# Altium PCB SparkControl_V0.1.PcbDoc (part 1 of 2)
Units mil, origin at the board's own origin, x right, y up, seen from the top; angles counter-clockwise.
Board outline 3543.31 x 2051.35 mil, 2 copper layers (Top Layer, Bottom Layer), stack 61.811 mil thick; 57 components, 42 nets, 228 pads, 73 vias.
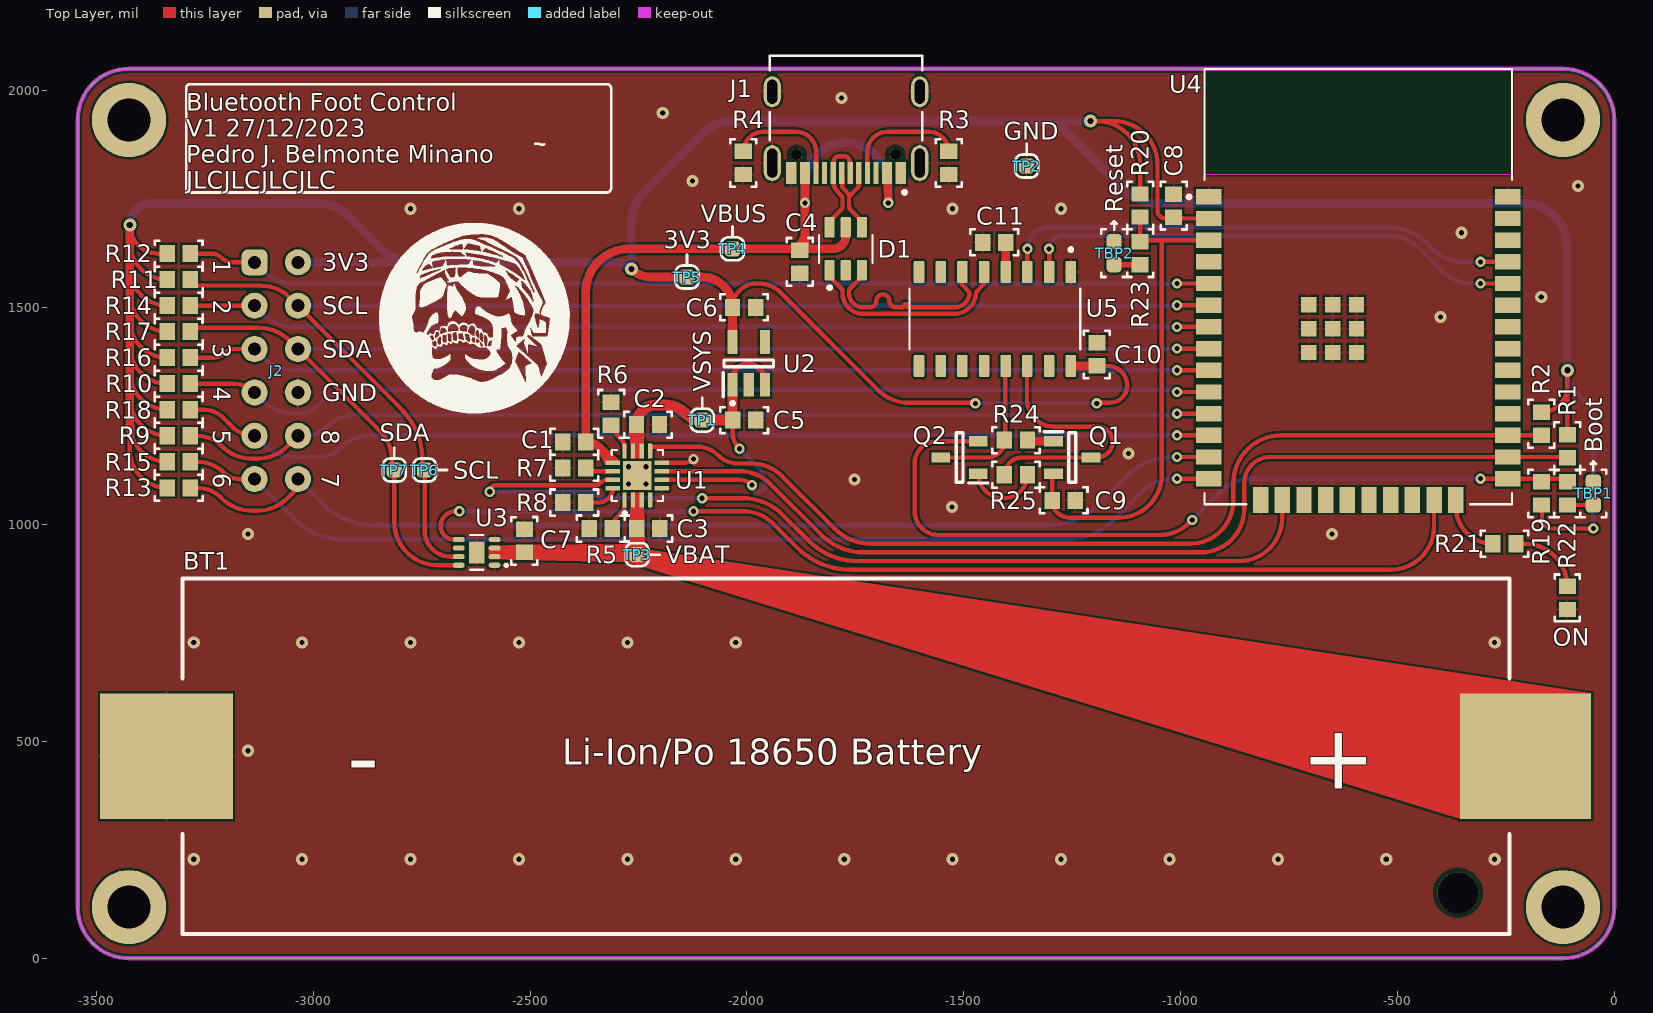
[diagram p0: Top Layer view]
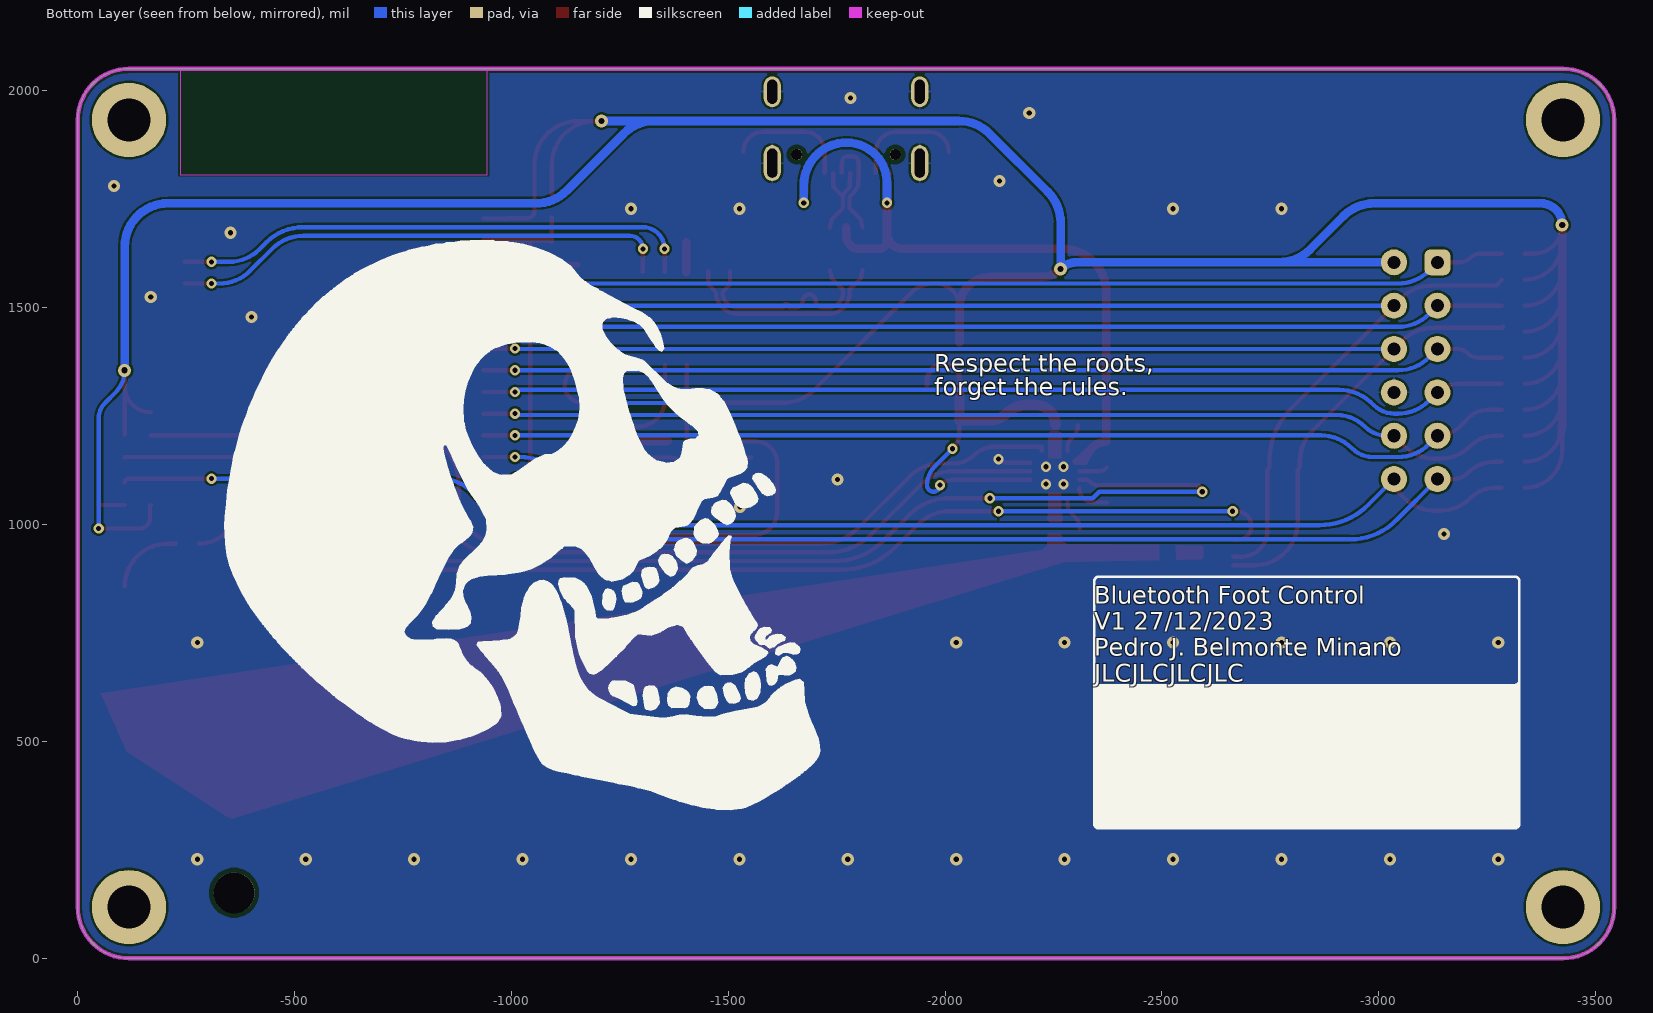
[diagram p1: Bottom Layer view, seen from below]
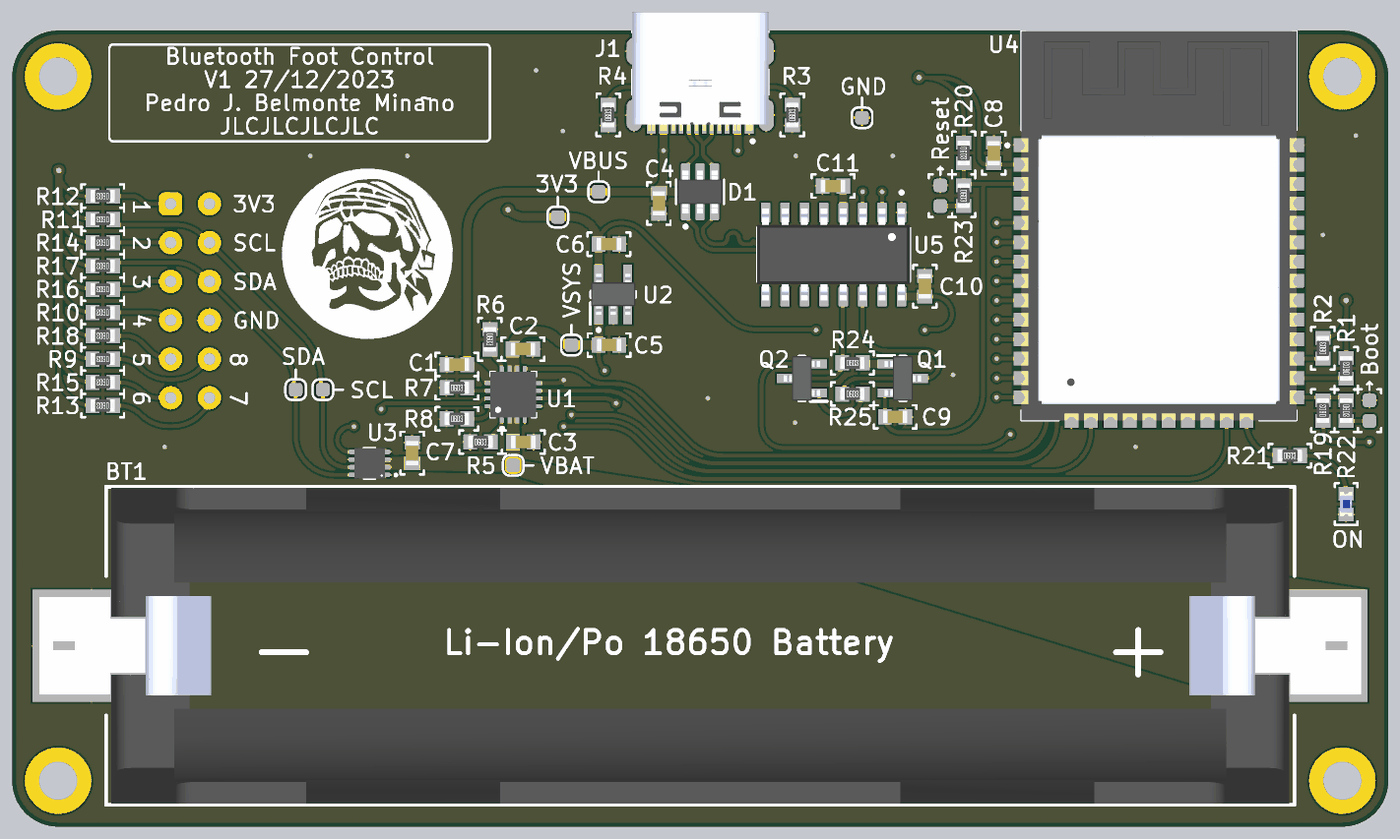
[diagram p2: 3D render of the assembled board from above, using the file's embedded part models]

## Layer stack, top to bottom
Top Solder: solder mask 0.5, Solder Resist, Dk 3.8
Top Layer: signal copper 1.378
Dielectric 1: dielectric 59.055, FR-4, Dk 4.5
Bottom Layer: signal copper 1.378
Bottom Solder: solder mask 0.5, Solder Resist, Dk 3.8

## Board outline
-3543.31,118.11 -3543.31,1933.24 cw(c-3425.2,1933.24) -3425.2,2051.35 -118.11,2051.35 cw(c-118.11,1933.24) 0,1933.24 0,118.11 cw(c-118.11,118.11) -118.11,0 -3425.2,0 cw(c-3425.2,118.11)

## Design rules (kind name [scope] priority, off if disabled: settings)
BoardOutlineClearance [All] p1: gap=7.87 ignorepadtopadclearanceinfootprint=FALSE
Clearance [All] p1: gap=5 ignorepadtopadclearanceinfootprint=FALSE except(7.87: Arc-SMDPad Track-SMDPad; 10: Arc-Via Arc-Hole Track-Via Track-Hole SMDPad-THPad SMDPad-Hole THPad-Hole Via-Hole Fill-Hole Poly-Hole Region-Hole Text-Hole)
ComponentClearance [All] p1: gap=5 collisioncheckmode=3 verticalgap=5 showdistances=TRUE
DiffPairsRouting DiffPair_diff90DiffPairsRouting [InDifferentialPairClass('diff90')] p1: maxlimit=61 minlimit=5 mostfreqgap=5 toplayer_minwidth=10 toplayer_maxwidth=10.01 toplayer_prefwidth=10 bottomlayer_minwidth=10 bottomlayer_maxwidth=10.01 bottomlayer_prefwidth=10 impedanceprofiledriven=TRUE impedanceprofileid={D8C5F25A-CF25-4C84-996E-1A9095AA118A} impedanceprofilevalue=90.000000 maxuncoupledlength=10
DiffPairsRouting [All] p2: maxlimit=10 minlimit=5 mostfreqgap=5 toplayer_minwidth=5 toplayer_maxwidth=1000 toplayer_prefwidth=5 bottomlayer_minwidth=5 bottomlayer_maxwidth=1000 bottomlayer_prefwidth=5 maxuncoupledlength=500
Height [All] p1: minheight=0 maxheight=71497.94 prefheight=500
HoleSize [All] p1: absolutevalues=TRUE maxlimit=248.03 minlimit=11.81 maxpercent=80.000 minpercent=20.000
HoleToHoleClearance [All] p1: gap=19.68 allowstackedmicrovias=FALSE
MatchedLengths DiffPair_diff90MatchedLengths [InDifferentialPairClass('diff90')] p1: tolerance=10 checknetsindiffpair=TRUE checkdiffpairvsdiffpair=FALSE checkxsignals=FALSE checkothers=FALSE
MinimumAnnularRing [All] p1: minimumring=5.12
MinimumSolderMaskSliver [All] p1: minsoldermaskwidth=0
PlaneClearance [InNet('GND')] p1: clearance=5
PlaneConnect PlaneConnectPowerPads [InPadClass('PowerPads')] p1: planeconnectstyle=Direct reliefexpansion=20 reliefentries=4 reliefconductorwidth=10 reliefairgap=10
PlaneConnect [InNet('GND')] p2: pad.planeconnectstyle=Relief pad.reliefexpansion=11.81 pad.reliefentries=4 pad.reliefconductorwidth=5 pad.reliefairgap=5 via.planeconnectstyle=Direct via.reliefexpansion=11.81 via.reliefentries=4 via.reliefconductorwidth=5 via.reliefairgap=5
PolygonConnect PolygonConnectPowerPads [InNet('GND') vs (InPadClass('PowerPads'))] p1: connectstyle=Direct reliefconductorwidth=10 reliefentries=4 polygonreliefangle="90 Angle" airgapwidth=10
PolygonConnect [InNet('GND')] p2: thpad.connectstyle=Relief thpad.reliefconductorwidth=5 thpad.reliefentries=4 thpad.polygonreliefangle="90 Angle" thpad.airgapwidth=5 smdpad.connectstyle=Relief smdpad.reliefconductorwidth=5 smdpad.reliefentries=4 smdpad.polygonreliefangle="90 Angle" smdpad.airgapwidth=5 via.connectstyle=Direct via.reliefconductorwidth=5 via.reliefentries=4 via.polygonreliefangle="90 Angle" via.airgapwidth=5
RoutingVias [All] p1: holewidth=11.81 width=23.62 viastyle="Through Hole" minholewidth=11.81 minwidth=19.68 maxholewidth=248.03 maxwidth=259.84
SilkToSilkClearance [All] p1: silktosilkclearance=0
SilkToSolderMaskClearance [IsPad] p1: minsilkscreentomaskgap=5.91 clearancetoexposedcopper=TRUE
SolderMaskExpansion [All] p1: expansion=1.5 istentingtop=FALSE
Width [All] p1: maxlimit=1000 minlimit=5 preferedwidth=5 minimp=50.000000 maximp=50.000000 favimp=50.000000
20 further rules are at their usual default settings.

## Classes and differential pairs
component class ESP32: C8 C9 C10 C11 J2 ON Q1 Q2 R9 R10 R11 R12 R13 R14 R15 R16 R17 R18 R19 R20 R21 R22 R23 R24 R25 TBP1 TBP2 TP6 TP7 U4 U5
component class U_USB_&_Power: BT1 C1 C2 C3 C4 C5 C6 C7 D1 J1 R1 R2 R3 R4 R5 R6 R7 R8 TP1 TP2 TP3 TP4 TP5 U1 U2 U3
differential pair class diff90: NRF USB USB_2
differential pair USB: +USB_P -USB_N
differential pair NRF: +NRF_P -NRF_N

## Components (designator, comment, footprint, x,y, rotation, side; value= is the part's Value field where it differs from the comment)
BT1 "BH-18650-B1BA002" BH-18650-B1BA002 -1771.65,466 r0 top locked
C1 "1 µF" "CAP 0603_1608" -2398.31,1191 r0 top
C2 "4.7 µF" "CAP 0603_1608" -2228.31,1230.5 r180 top
C3 "4.7 µF" "CAP 0603_1608" -2227.31,991 r180 top
C4 "0.1 µF" "CAP 0603_1608" -1878.31,1606 r90 top
C5 "1 µF" "CAP 0603_1608" -2006.43,1241 r180 top
C6 "1 µF" "CAP 0603_1608" -2006.73,1501 r180 top
C7 "0.1 µF" "CAP 0603_1608" -2513.31,962.57 r270 top
C8 "0.1 µF" "CAP 0603_1608" -1016,1735.57 r270 top
C9 "1 µF" "CAP 0603_1608" -1269.73,1056 r180 top
C10 "0.1 µF" "CAP 0603_1608" -1193.31,1392.57 r270 top
C11 "0.1 µF" "CAP 0603_1608" -1429.88,1651 r0 top
D1 "USBLC6-2SC6" SOT95P280X145-6N -1772.26,1636 r90 top locked
J1 "USB-TYPE-C-017" USB-TYPE-C-017 -1771.65,1811.27 r180 top locked
J2 "Button Pinout" PINOUT -3085.37,1355 r270 top locked
ON "Blue" "LED 0603_1608 BLUE" -108.31,831 r270 top (schematic designator D2)
Q1 "S8050" SOT95P240X115-3N -1249.81,1155 r0 top
Q2 "S8050" SOT95P240X115-3N -1509.81,1155 r180 top
R1 "4.7 kΩ" "RES 0603_1608" -108.31,1181 r90 top
R2 "4.7 kΩ" "RES 0603_1608" -168.31,1232.57 r90 top
R3 "5.1 kΩ" "RES 0603_1608" -1534.64,1834.15 r90 top
R4 "5.1 kΩ" "RES 0603_1608" -2008.66,1834.15 r90 top
R5 "10 kΩ" "RES 0603_1608" -2337.31,991 r0 top
R6 "4.7 kΩ" "RES 0603_1608" -2313.31,1255.57 r270 top
R7 "47 kΩ" "RES 0603_1608" -2398.31,1131 r0 top
R8 "1.78 kΩ" "RES 0603_1608" -2398.31,1051 r0 top
R9 "4.7 kΩ" "RES 0603_1608" -3310.37,1205 r180 top
R10 "4.7 kΩ" "RES 0603_1608" -3310.37,1325 r180 top
R11 "4.7 kΩ" "RES 0603_1608" -3310.37,1565 r180 top
R12 "4.7 kΩ" "RES 0603_1608" -3310.37,1625 r180 top
R13 "4.7 kΩ" "RES 0603_1608" -3310.37,1085 r180 top
R14 "4.7 kΩ" "RES 0603_1608" -3310.37,1505 r180 top
R15 "4.7 kΩ" "RES 0603_1608" -3310.37,1145 r180 top
R16 "4.7 kΩ" "RES 0603_1608" -3310.37,1385 r180 top
R17 "4.7 kΩ" "RES 0603_1608" -3310.37,1445 r180 top
R18 "4.7 kΩ" "RES 0603_1608" -3310.37,1265 r180 top
R19 "12k" "RES 0603_1608" -168.31,1072 r90 top value="12 kΩ"
R20 "12k" "RES 0603_1608" -1093.31,1736 r270 top value="12 kΩ"
R21 "470" "RES 0603_1608" -253.31,956 r0 top value="470 Ω"
R22 "470" "RES 0603_1608" -108.31,1072 r270 top value="470 Ω"
R23 "470" "RES 0603_1608" -1093.31,1626 r270 top value="470 Ω"
R24 "12k" "RES 0603_1608" -1379.81,1195 r0 top value="12 kΩ"
R25 "12k" "RES 0603_1608" -1379.81,1115 r0 top value="12 kΩ"
TBP1 "Boot" "Tweezer-bridgeable Pads" -48.31,1072 r90 top
TBP2 "Reset" "Tweezer-bridgeable Pads" -1153.31,1626 r90 top
TP1 "VSYS" TestPoint -2103.31,1241 r90 top
TP2 "GND" TestPoint -1355,1827 r90 top
TP3 "VBAT" TestPoint -2253.31,931 r0 top
TP4 "VBUS" TestPoint -2033.31,1636 r90 top
TP5 "3V3" TestPoint -2138.31,1571 r90 top
TP6 "SCL" TestPoint -2743.31,1126 r0 top
TP7 "SDA" TestPoint -2813.31,1126 r90 top
U1 "BQ24075RGTR" QFN50P300X300X100-17N -2252.95,1113.43 r90 top
U2 "ME6211C33M5G-N" SOT95P270X145-5N -1995.91,1371.79 r90 top
U3 "MAX17048G+" SON50P200X200X80-9N -2623.31,936 r180 top
U4 "ESP32-WROOM-32E_(16MB)" XCVR_ESP32-WROOM-32E_(16MB) -590.55,1548.91 r0 top locked
U5 "CH340C" SOIC127P600X180-16N -1428.31,1474.27 r270 top locked

## Footprints (in the part's own frame and the unit in brackets; to place one, negate y for a bottom-side part, rotate by r counter-clockwise, add the part's x,y. Pads: shape width x height; smd on the part's side, far side on the other; paste and mask are expansions set on the pad)
BH-18650-B1BA002 [mm]
  rect 7.77x7.35 smd: N(-39.8,0)
  rect 7.7x7.35 smd: P(39.8,0)
  round 2.39 hole 2.4 unplated: ""(35.84,-8)
  silkscreen extent -38.86,-10.41 38.86,10.41, body extent -43.23,-10.33 43.23,10.33, height 14.86
"CAP 0603_1608" [mm] "Chip Capacitor, 2-Leads, Body 1.60x0.80mm, IPC Medium Density"
  rect 0.9x1 smd: 1(-0.675,0) 2(0.675,0)
  silkscreen extent -1.4,-0.76 1.4,0.76, body extent -0.8,-0.41 0.8,0.41, height 0.82
"LED 0603_1608 BLUE" [mm] "Chip Diode, 2-Leads, Body 1.60x0.80mm, IPC Medium Density"
  rect 0.9x1 smd: 1(-0.675,0) 2(0.675,0)
  silkscreen extent -1.37,-0.74 1.37,0.74, body extent -0.8,-0.4 0.8,0.4, height 0.53
PINOUT [mil]
  rrect50% 60x60 hole 30: 1(-250,-50)
  round 60 hole 30: 2(-150,-50) 3(-50,-50) 4(50,-50) 5(150,-50) 6(250,-50) 7(250,50) 8(150,50) 9(50,50) 10(-50,50) 11(-150,50) 12(-250,50)
QFN50P300X300X100-17N [mm]
  rrect25% 0.86x0.26 smd: 1(-1.435,0.75) 2(-1.435,0.25) 3(-1.435,-0.25) 4(-1.435,-0.75) 9(1.435,-0.75) 10(1.435,-0.25) 11(1.435,0.25) 12(1.435,0.75)
  rrect25% 0.26x0.86 smd: 5(-0.75,-1.435) 6(-0.25,-1.435) 7(0.25,-1.435) 8(0.75,-1.435) 13(0.75,1.435) 14(0.25,1.435) 15(-0.25,1.435) 16(-0.75,1.435)
  rect 1.68x1.68 smd paste-2: 17(0,0)
  silkscreen extent -2.34,-1.5 1.5,1.5, body extent -1.5,-1.5 1.5,1.5, height 1
"RES 0603_1608" [mm] "Chip Resistor, 2-Leads, Body 1.60x0.80mm, IPC Medium Density"
  rect 0.9x1 smd: 1(-0.675,0) 2(0.675,0)
  silkscreen extent -1.4,-0.76 1.4,0.76, body extent -0.8,-0.4 0.8,0.4, height 0.45
SOIC127P600X180-16N [mm]
  rrect25% 1.31x0.62 smd: 1(-2.75,4.445) 2(-2.75,3.175) 3(-2.75,1.905) 4(-2.75,0.635) 5(-2.75,-0.635) 6(-2.75,-1.905) 7(-2.75,-3.175) 8(-2.75,-4.445) 9(2.75,-4.445) 10(2.75,-3.175) 11(2.75,-1.905) 12(2.75,-0.635) 13(2.75,0.635) 14(2.75,1.905) 15(2.75,3.175) 16(2.75,4.445)
  silkscreen extent -4.16,-5 1.78,5, body extent -3,-5 3,5, height 1.8
SON50P200X200X80-9N [mm]
  oval 0.7x0.3 smd: 1(-1.05,0.75) 2(-1.05,0.25) 3(-1.05,-0.25) 4(-1.05,-0.75) 5(1.05,-0.75) 6(1.05,-0.25) 7(1.05,0.25) 8(1.05,0.75)
  rect 0.9x1.3 smd paste-2: 9(0,0)
  silkscreen extent -1.78,-1.02 0.38,1.02, body extent -1,-1 1,1, height 0.8
SOT95P240X115-3N [mm]
  rect 1.1x0.6 smd: 1(-1.1,0.95) 2(-1.1,-0.95) 3(1.1,0)
  silkscreen extent -1.65,-1.45 0.2,1.5, body extent -1.2,-1.45 1.2,1.45, height 1.15
SOT95P270X145-5N [mm]
  rect 1.4x0.6 smd: 1(-1.25,0.95) 2(-1.25,0) 3(-1.25,-0.95) 4(1.25,-0.95) 5(1.25,0.95)
  silkscreen extent -2.44,-1.45 0.2,1.5, body extent -1.35,-1.45 1.35,1.45, height 1.45
SOT95P280X145-6N [mm]
  rrect25% 1.21x0.59 smd: 1(-1.255,0.95) 2(-1.255,0) 3(-1.255,-0.95) 4(1.255,-0.95) 5(1.255,0) 6(1.255,0.95)
  silkscreen extent -2.38,-1.57 0.81,1.57, body extent -1.4,-1.46 1.4,1.46, height 1.44
TestPoint [mil]
  rrect50% 35x35 smd mask+4: 1(0,0)
  silkscreen extent -26,-26 52,26
"Tweezer-bridgeable Pads" [mil]
  rrect50% 35x35 smd: 1(-26.57,0) 2(26.57,0)
  silkscreen extent -55,-30 74,30
USB-TYPE-C-017 [mm]
  rect 0.6x1.3 smd paste-100 mask+0.05: A1B12(-3.2,0.007) A4B9(-2.4,0.007) B1A12(3.2,0.007) B4A9(2.4,0.007)
  rect 0.3x1.3 smd paste-100 mask+0.05: A5(-1.25,0.007) A6(-0.25,0.007) A7(0.25,0.007) A8(1.25,0.007) B5(1.75,0.007) B6(0.75,0.007) B7(-0.75,0.007) B8(-1.75,0.007)
  oval 1x2.1 hole 0.6 slot 1.7 at 90 deg paste+0 mask+0.05: S1(-4.32,-0.571) S2(4.32,-0.571)
  oval 1x1.8 hole 0.6 slot 1.4 at 90 deg paste+0 mask+0.05: S3(-4.32,-4.751) S4(4.32,-4.751)
  round 0.65 hole 0.65 unplated paste+0: ""(-2.89,-1.07) ""(2.89,-1.071)
  silkscreen extent -4.47,-6.86 4.47,1.24, body extent -4.47,-7.3 4.47,0.45, height 3.26
XCVR_ESP32-WROOM-32E_(16MB) [mm]
  rect 1.5x0.9 smd: 1(-8.75,5.26) 2(-8.75,3.99) 3(-8.75,2.72) 4(-8.75,1.45) 5(-8.75,0.18) 6(-8.75,-1.09) 7(-8.75,-2.36) 8(-8.75,-3.63) 9(-8.75,-4.9) 10(-8.75,-6.17) 11(-8.75,-7.44) 12(-8.75,-8.71) 13(-8.75,-9.98) 14(-8.75,-11.25) 25(8.75,-11.25) 26(8.75,-9.98) 27(8.75,-8.71) 28(8.75,-7.44) 29(8.75,-6.17) 30(8.75,-4.9) 31(8.75,-3.63) 32(8.75,-2.36) 33(8.75,-1.09) 34(8.75,0.18) 35(8.75,1.45) 36(8.75,2.72) 37(8.75,3.99) 38(8.75,5.26)
  rect 0.9x1.5 smd: 15(-5.715,-12.5) 16(-4.445,-12.5) 17(-3.175,-12.5) 18(-1.905,-12.5) 19(-0.635,-12.5) 20(0.635,-12.5) 21(1.905,-12.5) 22(3.175,-12.5) 23(4.445,-12.5) 24(5.715,-12.5)
  rect 0.9x0.9 smd: 39(-2.9,-3.86) 39(-2.9,-2.46) 39(-2.9,-1.06) 39(-1.5,-3.86) 39(-1.5,-2.46) 39(-1.5,-1.06) 39(-0.1,-3.86) 39(-0.1,-2.46) 39(-0.1,-1.06)
  Keep-Out Layer region: 9,6.56 -9,6.56 -9,12.75 9,12.75
  silkscreen extent -10.01,-12.75 9,12.75, body extent -9,-12.75 9,12.75, height 3.25

## Part data
BT1: Package="DFN-8 Memory Protection Devices", Availability=Unavailable, MF="MPD _Memory", MP=BH-18650-PC, Price=None, SnapEDA_Link=https://www.snapeda.com/parts/BH-18650-PC/MPD%20%28Memory%20Protection%20Devices%29/view-part/779074/?ref=snap
C1 C5 C6 C9: library part 0603B105K250CT, "CAP CER 1UF 25V X7R 0603", Device Package=0603, Manufacturer="Walsin Technology Corporation", Operating Temperature="-55°C ~ 125°C", Package / Case="0603 (1608 Metric)", Supplier Part Number 1=1292-0603B105K250CT-ND, Temperature Coefficient=X7R, Tolerance=±10%, Voltage - Rated=25V, Applications="General Purpose", Capacitance="1 µF", ComponentLink1Description=Datasheet, ComponentLink1URL=https://www.passivecomponent.com/wp-content/uploads/datasheet/WTC_MLCC_General_Purpose.pdf, ComponentLink2Description="DigiKey Link", ComponentLink2URL=https://www.digikey.com/en/products/detail/walsin-technology-corporation/0603B105K250CT/14836817, lastupdated="16/06/2023 19:14:03", Lifecycle Status=Active, Minimum Order=1, Mounting Type="Surface Mount, MLCC", packaging=TapeAndReel, Part Number=0603B105K250CT, Part Status=Active, PartId=41189, Price=0.03, series=-, Size / Dimension="0.063\" L x 0.031\" W (1.60mm x 0.80mm)", Supplier 1=DigiKey, Thickness (Max)="0.037\" (0.95mm)"
C2 C3: library part 0603YW475KAT2A, "CAP CER 4.7UF 16V X6S 0603", Device Package=0603, Manufacturer="KYOCERA AVX", Operating Temperature="-55°C ~ 105°C", Package / Case="0603 (1608 Metric)", Supplier Part Number 1=478-0603YW475KAT2ACT-ND, Temperature Coefficient=X6S, Tolerance=±10%, Voltage - Rated=16V, Applications="General Purpose", Capacitance="4.7 µF", ComponentLink1Description=Datasheet, ComponentLink1URL=https://catalogs.kyocera-avx.com/SurfaceMount.pdf, ComponentLink2Description="DigiKey Link", ComponentLink2URL=https://www.digikey.com/en/products/detail/kyocera-avx/0603YW475KAT2A/14112130, lastupdated="16/06/2023 19:14:19", Lifecycle Status=Active, Minimum Order=1, Mounting Type="Surface Mount, MLCC", packaging=TapeAndReel, Part Number=0603YW475KAT2A, Part Status=Active, PartId=35833, Price=0.07, series=-, Size / Dimension="0.063\" L x 0.031\" W (1.60mm x 0.80mm)", Supplier 1=DigiKey, Thickness (Max)="0.039\" (1.00mm)"
C4 C8 C10 C11: library part 100X14W104MV4T, "CAP CER 0.1UF 10V X7R 0603", Device Package=0603, Manufacturer="Johanson Dielectrics Inc.", Operating Temperature="-55°C ~ 125°C", Package / Case="0603 (1608 Metric)", Supplier Part Number 1=709-1101-1-ND, Temperature Coefficient=X7R, Tolerance=±20%, Voltage - Rated=10V, Applications="Bypass, Decoupling", Capacitance="0.1 µF", ComponentLink1Description=Datasheet, ComponentLink1URL=https://www.johansondielectrics.com/downloads/x2y-filter-and-decoupling-capacitors.pdf, ComponentLink2Description="DigiKey Link", ComponentLink2URL=https://www.digikey.com/en/products/detail/johanson-dielectrics-inc/100X14W104MV4T/1655914, Features="Low ESL (X2Y)", lastupdated="16/06/2023 19:15:23", Lifecycle Status=Active, Minimum Order=1, Mounting Type="Surface Mount, MLCC", packaging=TapeAndReel, Part Number=100X14W104MV4T, Part Status=Active, PartId=2680, Price=0.08, series=X2Y®, Size / Dimension="0.064\" L x 0.035\" W (1.63mm x 0.89mm)", Supplier 1=DigiKey, Thickness (Max)="0.026\" (0.66mm)"
C7: library part C0603C104K5RAC7411, "CAP CER 0.1UF 50V X7R 0603", Device Package="0603 (1608 Metric)", Manufacturer=KEMET, Operating Temperature="-55°C ~ 125°C", Supplier Part Number 1=399-C0603C104K5RAC7411CT-ND, Temperature Coefficient=X7R, Tolerance=±10%, Voltage - Rated=50V, Applications="Bypass, Decoupling", Capacitance="0.1 µF", ComponentLink1Description=Datasheet, ComponentLink1URL=https://api.kemet.com/component-edge/download/datasheet/C0603C104K5RAC7411.pdf, ComponentLink2Description="DigiKey Link", ComponentLink2URL=https://www.digikey.com/en/products/detail/kemet/C0603C104K5RAC7411/3317013, lastupdated="10/08/2023 19:08:04", Lifecycle Status=Active, Minimum Order=1, Mounting Type="Surface Mount, MLCC", Package / Case="0603 (1608 Metric)", packaging=TapeAndReel, Part Number=C0603C104K5RAC7411, Part Status=Active, PartId=2233, Price=0.01, series="SMD Comm X7R", Size / Dimension="0.063\" L x 0.031\" W (1.60mm x 0.80mm)", Supplier 1=DigiKey, Thickness (Max)="0.035\" (0.90mm)"
D1: "Very low capacitance ESD protection, 3.5 pF, -40 to 125 degC, 6-Pin SOT23, RoHS, Tape and Reel", Capacitance Value=3.5pF, Clamping Voltage=17V, Leakage Current=0.15uA, Manufacturer=STMicroelectronics, Operating Temp Range=-40Cto125C, Operating Temperature Classification=Automotive, Operating Temperature Max Deg. C=125C, Operating Temperature Min Deg. C=-40C, Package / Case=SOT-23, Package Description="6-Pin Small Outline Transistor, Body 2.925 x 1.625 mm, Pitch 0.95 mm", Package Reference=SOT23-6L, Peak Pulse Current=5A, Reverse Breakdown Voltage=6V, Reverse Stand-off Voltage=5V, Test Current (It)=1mA, Category=Diode, Clamping Voltage (Max)=17V, Configuration=Dual, Datasheet URL=http://www.st.com/st-web-ui/static/active/en/resource/technical/document/datasheet/CD00050750.pdf, Datasheet Version="Rev. 5, 10/2011", Direction Type=Uni-Directional, Leakage Current (Max)=0.15uA, Manufacturer Part Number=USBLC6-2SC6, Manufacturer URL=http://www.st.com/, Mounting=SurfaceMount, Mounting Style=SurfaceMount, Number of Elements=1, packaging=TapeandReel, Pin Count=6, Polarity=Uni-Directional, Product Depth (mm)=1.75mm, Product Height (mm)=1.3mm, Product Length (mm)=3.05mm, Rad Hardened=No, Suppressor Type=DiodeArrays, Working Voltage=5V, Working Voltage (Max)=5V
J1: "3A 1 Surface Mount 16P Female -25℃~+85℃ Type-C SMD USB Connectors ROHS", Package=None, Availability="In Stock", Check_prices=https://www.snapeda.com/parts/CSP-USC16-TR/Valcon/view-part/?ref=eda, MF=Valcon, MP=CSP-USC16-TR, Price=None, Purchase-URL=https://pricing.snapeda.com/search/part/CSP-USC16-TR/?ref=eda, SnapEDA_Link=https://www.snapeda.com/parts/CSP-USC16-TR/Valcon/view-part/?ref=snap
ON: library part LED, "LED BLUE 0603 SMD", Current - Test=20mA, Device Package="0603 (1608 Metric)", Lens Color=1.00mm, Manufacturer="Vishay Semiconductor Opto Division", Millicandela Rating=104mcd, Part Number=VLMB1300-GS08, Supplier Device Package=0603, Supplier Part Number 1=VLMB1300-GS08CT-ND, Voltage - Forward (Vf) (Typ)=3.3V, Category=LED, Color=Blue, ComponentLink1Description=Datasheet, ComponentLink1URL=http://www.vishay.com/docs/82437/vlmo1300.pdf, ComponentLink2Description="DigiKey Link", ComponentLink2URL=http://digikey.com/product-detail/en/vishay-semiconductor-opto-division/VLMB1300-GS08/VLMB1300-GS08CT-ND/3025485, Configuration=Standard, Height (Max)=1.00mm, lastupdated="09/02/2020 01:20:26", Lens Size="1.10mm x 0.80mm", Lens Style="Rectangle with Flat Top", Lifecycle Status=Active, Minimum Order=1, Mounting Type="Surface Mount", Package / Case="0603 (1608 Metric)", packaging=TapeAndReel, Part Status=Active, PartId=785, Price=0.08, series=CHIPLED, Size=0603, Size / Dimension="1.60mm L x 0.80mm W", Supplier 1=DigiKey, Viewing Angle=130°, Wavelength - Dominant=470nm, Wavelength - Peak=468nm
Q1 Q2: "Transistor", Manufacturer_Name="Yenji Elec", Category="BJT Transistor", Datasheet Link=https://datasheet.lcsc.com/szlcsc/Yenji-Elec-S8050_C139514.pdf, Height=1.15mm, Manufacturer_Part_Number=S8050
R1 R2 R9 R10 R11 R12 R13 R14 R15 R16 R17 R18: library part ERA-3AEB472V, "RES SMD 4.7K OHM 0.1% 1/10W 0603", Device Package=0603, Manufacturer="Panasonic Electronic Components", Operating Temperature="-55°C ~ 155°C", Package / Case="0603 (1608 Metric)", Power (Watts)="0.1W, 1/10W", Ratings=AEC-Q200, Resistance="4.7 kOhms", Supplier Part Number 1=P4.7KDBCT-ND, Temperature Coefficient=±25ppm/°C, Tolerance=±0.1%, ComponentLink1Description=Datasheet, ComponentLink1URL=https://industrial.panasonic.com/cdbs/www-data/pdf/RDM0000/AOA0000C307.pdf, ComponentLink2Description="DigiKey Link", ComponentLink2URL=https://www.digikey.com/en/products/detail/panasonic-electronic-components/ERA-3AEB472V/1465870, Composition="Thin Film", Features="Automotive AEC-Q200", Height - Seated (Max)="0.022\" (0.55mm)", lastupdated="02/08/2023 19:13:59", Lifecycle Status=Active, Minimum Order=1, Number of Terminations=2, packaging=TapeAndReel, Part Number=ERA-3AEB472V, Part Status=Active, PartId=5519, Price=0.03, series=ERA-3A, Size / Dimension="0.063\" L x 0.031\" W (1.60mm x 0.80mm)", Supplier 1=DigiKey, Supplier Device Package=0603
R3 R4: library part RMCF0603JG5K10, "RES 5.1K OHM 5% 1/10W 0603", Device Package=0603, Manufacturer="Stackpole Electronics Inc", Operating Temperature="-55°C ~ 155°C", Package / Case="0603 (1608 Metric)", Power (Watts)="0.1W, 1/10W", Ratings=AEC-Q200, Resistance="5.1 kOhms", Supplier Part Number 1=738-RMCF0603JG5K10CT-ND, Temperature Coefficient=±200ppm/°C, Tolerance=±5%, ComponentLink1Description=Datasheet, ComponentLink1URL=https://www.seielect.com/catalog/sei-packaging.pdf, ComponentLink2Description="DigiKey Link", ComponentLink2URL=https://www.digikey.com/en/products/detail/stackpole-electronics-inc/RMCF0603JG5K10/1712287, Composition="Thick Film", Features="Automotive AEC-Q200", Height - Seated (Max)="0.022\" (0.55mm)", lastupdated="16/06/2023 19:45:34", Lifecycle Status=Active, Minimum Order=1, Number of Terminations=2, packaging=CutTape, Part Number=RMCF0603JG5K10, Part Status=Active, PartId=5180, Price=0.01, series=RMCF, Size / Dimension="0.061\" L x 0.031\" W (1.55mm x 0.80mm)", Supplier 1=DigiKey, Supplier Device Package=0603
R5: library part RT0603FRE0710KL, "RES SMD 10K OHM 1% 1/10W 0603", Device Package=0603, Manufacturer=Yageo, Operating Temperature="-55°C ~ 155°C", Package / Case="0603 (1608 Metric)", Power (Watts)="0.1W, 1/10W", Resistance="10 kOhms", Supplier Part Number 1=YAG2321CT-ND, Temperature Coefficient=±50ppm/°C, Tolerance=±1%, ComponentLink1Description=Datasheet, ComponentLink1URL=https://www.yageo.com/upload/media/product/productsearch/datasheet/rchip/PYu-RT_1-to-0.01_RoHS_L_11.pdf, ComponentLink2Description="DigiKey Link", ComponentLink2URL=https://www.digikey.com/en/products/detail/yageo/RT0603FRE0710KL/1075040, Composition="Thin Film", Height - Seated (Max)="0.022\" (0.55mm)", lastupdated="16/06/2023 19:45:32", Lifecycle Status=Active, Minimum Order=1, Number of Terminations=2, packaging=TapeAndReel, Part Number=RT0603FRE0710KL, Part Status=Active, PartId=5671, Price=0.01, series=RT, Size / Dimension="0.063\" L x 0.031\" W (1.60mm x 0.80mm)", Supplier 1=DigiKey, Supplier Device Package=0603
R6: library part ERA-3AEB472V, "RES SMD 4.7K OHM 0.1% 1/10W 0603", Device Package=0603, Manufacturer="Panasonic Electronic Components", Operating Temperature="-55°C ~ 155°C", Package / Case="0603 (1608 Metric)", Power (Watts)="0.1W, 1/10W", Ratings=AEC-Q200, Resistance="4.7 kOhms", Supplier Part Number 1=P4.7KDBCT-ND, Temperature Coefficient=±25ppm/°C, Tolerance=±0.5%, ComponentLink1Description=Datasheet, ComponentLink1URL=https://industrial.panasonic.com/cdbs/www-data/pdf/RDM0000/AOA0000C307.pdf, ComponentLink2Description="DigiKey Link", ComponentLink2URL=https://www.digikey.com/en/products/detail/panasonic-electronic-components/ERA-3AEB472V/1465870, Composition="Thin Film", Features="Automotive AEC-Q200", Height - Seated (Max)="0.022\" (0.55mm)", lastupdated="02/08/2023 19:13:59", Lifecycle Status=Active, Minimum Order=1, Number of Terminations=2, packaging=TapeAndReel, Part Number=ERA-3AEB472V, Part Status=Active, PartId=5519, Price=0.03, series=ERA-3A, Size / Dimension="0.063\" L x 0.031\" W (1.60mm x 0.80mm)", Supplier 1=DigiKey, Supplier Device Package=0603
R7: library part RCS060347K0JNEA, "RES SMD 47K OHM 5% 1/4W 0603", Device Package=0603, Manufacturer="Vishay Dale", Operating Temperature="-55°C ~ 155°C", Package / Case="0603 (1608 Metric)", Power (Watts)="0.25W, 1/4W", Ratings=AEC-Q200, Resistance="47 kOhms", Supplier Part Number 1=541-2819-1-ND, Temperature Coefficient=±200ppm/°C, Tolerance=±5%, ComponentLink1Description=Datasheet, ComponentLink1URL=http://www.vishay.com/docs/20065/rcse3.pdf, ComponentLink2Description="DigiKey Link", ComponentLink2URL=https://www.digikey.com/en/products/detail/vishay-dale/RCS060347K0JNEA/5866965, Composition="Thick Film", Features="Automotive AEC-Q200, Pulse Withstanding", Height - Seated (Max)="0.020\" (0.50mm)", lastupdated="09/08/2023 19:48:23", Lifecycle Status=Active, Minimum Order=1, Number of Terminations=2, packaging=TapeAndReel, Part Number=RCS060347K0JNEA, Part Status=Active, PartId=5445, Price=0.01, series="RCS e3", Size / Dimension="0.061\" L x 0.033\" W (1.55mm x 0.85mm)", Supplier 1=DigiKey, Supplier Device Package=0603
R8: library part RNCP0603FTD1K78, "RES 1.78K OHM 1% 1/8W 0603", Device Package=0603, Manufacturer="Stackpole Electronics Inc", Operating Temperature="-55°C ~ 155°C", Package / Case="0603 (1608 Metric)", Power (Watts)="0.125W, 1/8W", Resistance="1.78 kOhms", Supplier Part Number 1=RNCP0603FTD1K78CT-ND, Temperature Coefficient=±100ppm/°C, Tolerance=±1%, ComponentLink1Description=Datasheet, ComponentLink1URL=https://www.seielect.com/catalog/sei-rncp.pdf, ComponentLink2Description="DigiKey Link", ComponentLink2URL=https://www.digikey.com/en/products/detail/stackpole-electronics-inc/RNCP0603FTD1K78/2240112, Composition="Thin Film", Features=Anti-Sulfur, Height - Seated (Max)="0.022\" (0.55mm)", lastupdated="16/06/2023 19:45:23", Lifecycle Status=Active, Minimum Order=1, Number of Terminations=2, packaging=TapeAndReel, Part Number=RNCP0603FTD1K78, Part Status=Active, PartId=6979, Price=0.01, series=RNCP, Size / Dimension="0.061\" L x 0.031\" W (1.55mm x 0.80mm)", Supplier 1=DigiKey, Supplier Device Package=0603
R19 R20 R24 R25: library part RMCF0603JT12K0, "RES 12K OHM 5% 1/10W 0603", Device Package="0603 (1608 Metric)", Manufacturer="Stackpole Electronics Inc", Operating Temperature="-55°C ~ 155°C", Power (Watts)="0.1W, 1/10W", Ratings=AEC-Q200, Resistance="12 kOhms", Supplier Device Package=0603, Supplier Part Number 1=RMCF0603JT12K0CT-ND, Temperature Coefficient=±200ppm/°C, Tolerance=±5%, Category=Res, ComponentLink1Description=Datasheet, ComponentLink1URL=https://www.seielect.com/catalog/sei-rmcf_rmcp.pdf, ComponentLink2Description="DigiKey Link", ComponentLink2URL=http://digikey.com/product-detail/en/stackpole-electronics-inc/RMCF0603JT12K0/RMCF0603JT12K0CT-ND/1943192, Composition="Thick Film", Features="Automotive AEC-Q200", Height - Seated (Max)="0.022\" (0.55mm)", lastupdated="09/02/2020 01:10:24", Lifecycle Status=Active, Minimum Order=1, Number of Terminations=2, Package / Case="0603 (1608 Metric)", packaging=CutTape, Part Number=RMCF0603JT12K0, Part Status=Active, PartId=5166, Price=0.10, series=RMCF, Size=0603, Size / Dimension="0.061\" L x 0.031\" W (1.55mm x 0.80mm)", Supplier 1=DigiKey
R21 R22 R23: library part RMCF0603JT470R, "RES 470 OHM 5% 1/10W 0603", Device Package="0603 (1608 Metric)", Manufacturer="Stackpole Electronics Inc", Operating Temperature="-55°C ~ 155°C", Power (Watts)="0.1W, 1/10W", Ratings=AEC-Q200, Resistance="470 Ohms", Supplier Device Package=0603, Supplier Part Number 1=RMCF0603JT470RCT-ND, Temperature Coefficient=±200ppm/°C, Tolerance=±5%, Category=Res, ComponentLink1Description=Datasheet, ComponentLink1URL=https://www.seielect.com/catalog/sei-rmcf_rmcp.pdf, ComponentLink2Description="DigiKey Link", ComponentLink2URL=http://digikey.com/product-detail/en/stackpole-electronics-inc/RMCF0603JT470R/RMCF0603JT470RCT-ND/1943166, Composition="Thick Film", Features="Automotive AEC-Q200", Height - Seated (Max)="0.022\" (0.55mm)", lastupdated="09/02/2020 01:10:23", Lifecycle Status=Active, Minimum Order=1, Number of Terminations=2, Package / Case="0603 (1608 Metric)", packaging=CutTape, Part Number=RMCF0603JT470R, Part Status=Active, PartId=5857, Price=0.10, series=RMCF, Size=0603, Size / Dimension="0.061\" L x 0.031\" W (1.55mm x 0.80mm)", Supplier 1=DigiKey
TBP1 TBP2: library part "Tweezer-Bridgeabled Pads", "Tweezer-Bridgeabled Pads"
TP1 TP2 TP3 TP4 TP5 TP6 TP7: library part TestPoint, "TestPoint"
U1: "Standalone 1-cell 1.5-A linear charger, Power Path, 4.2-V VBAT and 5.5-V VOUT 16-VQFN -40 to 85", Package=None, Availability=Unavailable, MP=BQ24075RGTR, Price=None
U2: "Fixed 6V 3.3V 500mA SOT-23-5 Low Dropout Regulators(LDO) RoHS", Manufacturer_Name=Microne, Datasheet Link=https://datasheet.lcsc.com/szlcsc/1811131510_MICRONE-Nanjing-Micro-One-Elec-ME6211C33M5G-N_C82942.pdf, Geometry.Height=1.45mm, Manufacturer_Part_Number=ME6211C33M5G-N
U3: "Battery Battery Monitor IC Lithium-Ion 8-TDFN-EP _2x2_", Package="TDFN-8 Maxim", Availability=Unavailable, MF="Maxim Integrated", MP=MAX17048G+, Price=None, SnapEDA_Link=https://www.snapeda.com/parts/MAX17048G%2B/Maxim%20Integrated/view-part/295942/?ref=snap
U4: "Bluetooth, WiFi 802.11b/g/n, Bluetooth v4.2 +EDR, Class 1, 2 and 3 Transceiver Module 2.4GHz ~ 2.5GHz Integrated, Trace Surface Mount", Package=None, Availability="Not in stock", Check_prices=https://www.snapeda.com/parts/ESP32-WROOM-32E%20(16MB)/Espressif+Systems/view-part/?ref=eda, MF="Espressif Systems", MP="ESP32-WROOM-32E (16MB)", Price=None, SnapEDA_Link=https://www.snapeda.com/parts/ESP32-WROOM-32E%20(16MB)/Espressif+Systems/view-part/?ref=snap
U5: "USB to serial chip CH340", Package=None, Availability="Not in stock", Category=Chip, Check_prices=https://www.snapeda.com/parts/CH340C/WCH/view-part/?ref=eda, MF=WCH, MP=CH340C, Price=None, SnapEDA_Link=https://www.snapeda.com/parts/CH340C/WCH/view-part/?ref=snap

## Free pads (board coordinates)
  round 171.26 hole 98.42: ""(-3425.2,118.11) ""(-3425.2,1933.24) ""(-118.11,118.11) ""(-118.11,1933.24)

## Via types
v1: diameter 28, hole 11.81, Top Layer to Bottom Layer, tented both sides, 37 vias
v2: diameter 23.62, hole 11.81, Top Layer to Bottom Layer, tented both sides, 28 vias
v3: diameter 23.62, hole 12, Top Layer to Bottom Layer, 4 vias
v4: diameter 30, hole 14, Top Layer to Bottom Layer, tented both sides, 4 vias

## Nets (pads, with @x,y where several pads share a name; then routed paths per layer and width w, separated by ;. In a path a pad name is that pad's centre, name@x,y a point inside that pad or via, vN(x,y) a via of type N, cw(c..) or ccw(c..) an arc to the next point about the centre after c; other vN are vias at no path point)
+3V3: C6.2 C8.2 C10.2 J2.12 R1.2 R2.2 R9.2 R10.2 R11.2 R12.2 R13.2 R14.2 R15.2 R16.2 R17.2 R18.2 R19.1 R20.1 TP5.1 U2.5 U4.2 U5.16 | length 9321.2
  Top Layer w10: -3423.31,1171.37 ccw(c-3336.94,1171.37) R13.2 ; -3423.31,1231.37 -3423.13,1231.37 -3423.13,1225.85 ; -3423.31,1291.37 ccw(c-3336.94,1291.37) R9.2 ; -3423.31,1351.37 ccw(c-3336.94,1351.37) R18.2 ; -3423.31,1411.37 ccw(c-3336.94,1411.37) R10.2 ; -3423.31,1471.37 ccw(c-3336.94,1471.37) R16.2 ; -3423.31,1531.37 ccw(c-3336.94,1531.37) R17.2 ; -3423.31,1591.37 ccw(c-3336.94,1591.37) R14.2 ; -3423.31,1651.37 ccw(c-3336.94,1651.37) R11.2 ; v4(-3423.31,1691) ccw(c-3357.31,1691) -3357.31,1625 R12.2 ; -3423.13,1172.08 -3423.13,1225.85 ; R15.2 cw(c-3336.94,1231.37) -3423.13,1225.85 ; C6.2 cw(c-1978.31,1501) -1978.31,1556 -1973.31,1556 cw(c-1973.31,1483.57) -1922.09,1534.79 -1697.6,1310.29 ccw(c-1626.89,1381) -1626.89,1281 -1474.72,1281 v2(-1473.42,1279.7) ; v4(-1208.31,1930.5) -1193.31,1930.5 ; v2(-1193.42,1279.7) -1192.12,1281 -1163.31,1281 ccw(c-1163.31,1321) -1123.31,1321 ccw(c-1168.31,1321) -1168.31,1366 C10.2 ; R20.1 -1093.31,1830.5 ccw(c-1193.31,1830.5) -1095.07,1849.18 ccw(c-1193.31,1830.5) -1193.31,1930.5 ; U4.2 -994,1706 -994,1706.38 -1036.04,1706.38 cw(c-1036.04,1723.65) -1053.31,1723.65 -1053.31,1830.5 ccw(c-1153.31,1830.5) -1153.31,1930.5 -1193.31,1930.5 ; R19.1 cw(c-168.31,1043.89) -166.77,1043.89 -166.77,1015.2 ccw(c-142.57,1015.2) -142.57,991 v2(-48.31,991) ; R2.2 ccw(c-168.31,1319.15) -108.31,1319.15 ; R1.2 -108.31,1319.15 ; v4(-108.31,1356) -108.31,1319.15
  Top Layer w20: -3423.31,1231.37 -3423.31,1291.37 -3423.31,1351.37 -3423.31,1411.37 -3423.31,1471.37 -3423.31,1531.37 -3423.31,1591.37 -3423.31,1651.37 v4(-3423.31,1691) ; v4(-2266.59,1589.52) ccw(c-2221.87,1634.24) -2259.5,1583.41 ccw(c-2221.87,1634.24) -2221.87,1571 TP5.1 -2103.31,1571 cw(c-2103.31,1501) C6.2 U2.5 ; U5.16 C10.2
  Bottom Layer w10: v2(-1473.42,1279.7) -1472.77,1280.35 -1194.07,1280.35 v2(-1193.42,1279.7) ; v4(-108.31,1356) ccw(c-35.88,1356) -87.09,1304.79 -63.31,1281 cw(c-99.52,1244.79) -48.31,1244.79 v2(-48.31,991)
  Bottom Layer w20: v4(-3423.31,1691) cw(c-3373.31,1691) -3373.31,1741 -2989.73,1741 cw(c-2989.73,1641) -2919.02,1711.71 -2841.6,1634.29 ccw(c-2770.89,1705) -2770.89,1605 ; J2.12 -2770.89,1605 ; v4(-1208.31,1930.5) -1208.81,1931 -1329.73,1931 ; v4(-108.31,1356) -108.31,1641 ccw(c-208.31,1641) -208.31,1741 -1056.89,1741 cw(c-1056.89,1841) -1127.6,1770.29 -1259.02,1901.71 ccw(c-1329.73,1831) -1329.73,1931 ; -2770.89,1605 -2303.95,1605 cw(c-2303.95,1552.15) -2273.11,1595.06 cw(c-2303.95,1552.15) v4(-2266.59,1589.52) -2266.59,1696.3 cw(c-2166.59,1696.3) -2237.3,1767.01 -2102.6,1901.71 cw(c-2031.89,1831) -2031.89,1931 -1329.73,1931
Btn_1: J2.1 R12.1 U4.5 | length 2370.1
  Top Layer w10: R12.1 -3234.09,1625 cw(c-3234.09,1594.27) -3212.37,1616 ccw(c-3185.81,1642.56) -3185.81,1605 J2.1 ; v2(-1008.31,1556) U4.5
  Bottom Layer w10: J2.1 -3115.66,1585.29 ccw(c-3044.95,1656) -3045.02,1556 -3044.96,1556 ; -3044.93,1556 v2(-1008.31,1556)
Btn_2: J2.2 R14.1 U4.7 | length 2364.7
  Top Layer w10: R14.1 J2.2 ; v2(-1008.31,1456) U4.7
  Bottom Layer w10: J2.2 -3115.66,1485.29 ccw(c-3044.95,1556) -3044.95,1456 v2(-1008.31,1456)
Btn_3: J2.3 R16.1 U4.9 | length 2370.1
  Top Layer w10: R16.1 -3229.51,1385 ccw(c-3229.51,1419.14) -3205.37,1395 cw(c-3181.22,1370.86) -3181.22,1405 J2.3 ; v2(-1008.31,1356) U4.9
  Bottom Layer w10: J2.3 -3115.66,1385.29 ccw(c-3044.95,1456) -3044.95,1356 v2(-1008.31,1356)
Btn_4: J2.4 R10.1 U4.10 | length 2388.1
  Top Layer w10: R10.1 -3183.65,1325 cw(c-3183.65,1256.72) J2.4 ; v2(-1008.31,1306) U4.10
  Bottom Layer w10: J2.4 -3115.66,1285.29 ccw(c-3044.95,1356) -3044.95,1256 -3036.59,1256 ccw(c-3036.59,1324.28) -2988.31,1276 cw(c-2907.83,1200.98) -2907.83,1311 -1013.31,1311 cw(c-1013.31,1306) v2(-1008.31,1306)
Btn_5: J2.5 R18.1 U4.12 | length 2397.2
  Top Layer w10: R18.1 -3251.82,1265 cw(c-3251.82,1203.54) -3208.37,1247 -3188.29,1226.92 ccw(c-3135.37,1279.84) J2.5 ; v2(-1008.31,1206) U4.12
  Bottom Layer w10: J2.5 -3115.66,1185.29 ccw(c-3044.95,1256) -3044.95,1156 -2986.59,1156 ccw(c-2986.59,1224.28) -2938.31,1176 -2937.6,1176.71 cw(c-2866.89,1106) -2866.89,1206 v2(-1008.31,1206)
Btn_6: J2.6 R15.1 U4.14 | length 2457.8
  Top Layer w10: R15.1 -3266.72,1145 cw(c-3266.72,1059.64) -3206.37,1120 ccw(c-3170.15,1156.21) -3170.15,1105 J2.6 ; v2(-1008.31,1106) U4.14
  Bottom Layer w10: J2.6 -3040.3,1009.93 ccw(c-2934.23,1116) -2934.23,966 -1261.73,966 ccw(c-1261.73,1116) -1155.66,1009.93 -1088.89,1076.71 cw(c-1018.18,1006) -1018.18,1106 v2(-1008.31,1106)
Btn_7: J2.7 R13.1 U4.13 | length 2469.6
  Top Layer w10: R13.1 -3267.89,1085 cw(c-3267.89,1006.47) -3212.37,1062 -3211.66,1061.29 ccw(c-3140.95,1132) -3140.95,1032 -3129.79,1032 ccw(c-3129.79,1132) -3059.08,1061.29 J2.7@-3035.37,1085 ; v2(-1008.31,1156) U4.13
  Bottom Layer w10: J2.7 -2975.66,1045.29 ccw(c-2863.9,1157.04) -2863.9,999 -1302.77,999 -1302.72,999 ccw(c-1302.77,1157.04) -1191.02,1045.29 -1124.24,1112.07 cw(c-1018.18,1006) -1018.18,1156 v2(-1008.31,1156)
Btn_8: J2.8 R9.1 U4.11 | length 2395.3
  Top Layer w10: R9.1 -3267.89,1205 cw(c-3267.89,1126.47) -3212.37,1182 -3211.66,1181.29 ccw(c-3140.95,1252) -3140.95,1152 -3129.79,1152 ccw(c-3129.79,1252) -3059.08,1181.29 J2.8 ; v2(-1008.31,1256) U4.11
  Bottom Layer w10: J2.8 -3019.01,1205 ccw(c-3019.01,1276.7) -2968.31,1226 cw(c-2903.39,1161.08) -2903.39,1252.89 -1011.42,1252.89 ccw(c-1011.42,1256) v2(-1008.31,1256)
D\T\R\: Q2.3 R24.1 U5.13 | length 343.9
  Top Layer w10: Q2.3 -1445.4,1155 ccw(c-1445.4,1195) -1405.4,1195 ccw(c-1405.4,1196.1) -1404.3,1196.1 U5.13@-1404.3,1367.75
EN: C9.2 Q1.2 R20.2 R23.1 U4.3 | length 1155.9
  Top Layer w10: Q1.2 ccw(c-1293.12,1114.41) -1296.31,1114.41 C9.2 ccw(c-1256.31,1056) -1256.31,1016 -1143.31,1016 ccw(c-1143.31,1116) -1043.31,1116 -1043.31,1648.21 cw(c-1035.51,1648.21) -1035.51,1656 ; R23.1 R23.1@-1093.31,1656 ; R20.2 R23.1@-1093.31,1656 ; U4.3 -1035.51,1656 ; R23.1@-1093.31,1656 -1035.51,1656
GND: BT1.N C1.1 C2.1 C3.1 C4.1 C5.1 C6.1 C7.1 C8.1 C9.1 C10.1 C11.1 D1.2 J1.A1B12 J1.B1A12 J1.S1 J1.S2 J1.S3 J1.S4 J2.9 ON.2 R3.1 R4.1 R5.1 R6.1 R7.1 R8.1 TBP1.2 TBP2.2 TP2.1 U1.4 U1.5 U1.8 U1.17 U2.2 U3.1 U3.4 U3.6 U3.9 U4.1 U4.15 U4.38 U4.39 U5.1 | length 75.3
  Top Layer w10: U1.8 -2142.72,1142.96 ccw(c-2142.72,1170.41) -2133.41,1144.59 ccw(c-2142.72,1170.41) v2(-2123.31,1151)
  other v1: -3275.79,228.53 -3025.79,228.53 -2775.79,228.53 -2525.79,228.53 -2275.79,228.53 -2025.79,228.53 -1775.79,228.53 -1525.79,228.53 -1275.79,228.53 -1025.79,228.53 -775.79,228.53 -525.79,228.53 -275.79,228.53 -3150.79,478.53 -3275.79,728.53 -3025.79,728.53 -2775.79,728.53 -2525.79,728.53 -2275.79,728.53 -2025.79,728.53 -275.79,728.53 -3150.79,978.53 -650.79,978.53 -1527.31,1041 -1752.31,1104 -1120.31,1164 -400.79,1478.53 -168.31,1525 -352.31,1673 -2775.79,1728.53 -2525.79,1728.53 -1525.79,1728.53 -1275.79,1728.53 -83.31,1781 -2125.49,1792.66 -2194.31,1949 -1782.31,1984
  other v3: -2272.95,1093.43 -2232.95,1093.43 -2272.95,1133.43 -2232.95,1133.43
IO0: Q2.2 R19.2 R22.1 U4.25 | length 1872.6
  Top Layer w10: Q2.2 -1561.91,1192.4 ccw(c-1561.91,1141) -1613.31,1141 -1613.31,1031 ccw(c-1558.31,1031) -1558.31,976 -1049.73,976 ccw(c-1049.73,1076) -979.02,1005.29 v2(-973.31,1011) ; v2(-308.31,1106) U4.25 -116.73,1106 cw(c-116.73,1097.57) R22.1@-108.31,1097.57
  Bottom Layer w10: v2(-973.31,1011) -907.6,1076.71 cw(c-836.89,1006) -836.89,1106 v2(-308.31,1106)
IO2: R21.1 U4.24 | length 151.5
  Top Layer w10: U4.24 -365.55,1041.67 ccw(c-279.88,1041.67) R21.1 cw(c-278.27,957.62) R21.1@-280.55,957.62
NetC11_2: C11.2 U5.4 | length 68.5
  Top Layer w20: U5.4 C11.2
NetD2_1: ON.1 R21.2 | length 174.6
  Top Layer w10: R21.2 -206.73,956 cw(c-206.73,857.57) -118.01,900.18 cw(c-206.73,857.57) ON.1
NetJ1_A5: J1.A5 R3.2 | length 289.3
  Top Layer w10: J1.A5 -1722.44,1859.74 cw(c-1676.18,1859.74) -1676.18,1906 -1580.9,1906 cw(c-1580.9,1859.74) R3.2@-1534.64,1859.74
NetJ1_B5: J1.B5 R4.2 | length 269.7
  Top Layer w10: R4.2@-2008.66,1859.74 cw(c-1962.4,1859.74) -1962.4,1906 -1886.81,1906 cw(c-1886.81,1859.74) -1840.55,1859.74 J1.B5
NetQ1_1: Q1.1 R24.2 | length 62.6
  Top Layer w20: R24.2@-1360.72,1195 ccw(c-1358.12,1195) -1358.12,1192.4 Q1.1@-1299.61,1192.4
NetQ2_1: Q2.1 R25.2 | length 176
  Top Layer w10: Q2.1 ccw(c-1409.9,1117.6) -1409.9,1061 -1406.81,1061 ccw(c-1406.81,1113.59) -1354.22,1113.59 R25.2@-1354.22,1115
NetR1_1: R1.1 U1.7 U4.26 | length 2307.7
  Top Layer w10: U1.7 -2017,1123.27 cw(c-2017,1023.27) -1987.35,1118.78 -1980.36,1116.6 cw(c-1988.31,1091) -1973.31,1113.22 cw(c-2017,1023.27) -1946.29,1093.99 -1829.31,977.01 ccw(c-1730.32,1076) -1730.32,936 -953.31,936 ccw(c-953.31,1036) -853.31,1036 -853.31,1096 cw(c-793.31,1096) -793.31,1156 U4.26 -109.88,1156 cw(c-109.88,1154.43) R1.1
NetR2_1: R2.1 U1.9 U4.27 | length 2302.3
  Top Layer w10: U1.9 -2223.31,1179.84 -2113.79,1179.84 cw(c-2113.79,1115.52) -2068.31,1161 ccw(c-2020.02,1209.28) -2020.02,1141 -1989.73,1141 cw(c-1989.73,1041) -1919.02,1111.71 -1798.45,991.15 ccw(c-1713.6,1076) -1713.6,956 -978.31,956 ccw(c-978.31,1056) -878.31,1056 -878.31,1096 cw(c-768.31,1096) -768.31,1206 U4.27 R2.1
NetR5_2: R5.2 U1.1 | length 75.2
  Top Layer w10: R5.2 cw(c-2273.13,991) -2299.73,1017.58 -2288.31,1029 ccw(c-2302.37,1043.06) -2282.48,1043.06 U1.1
NetR6_2: R6.2 U1.12 | length 66.3
  Top Layer w10: R6.2@-2306.31,1229 ccw(c-2267.68,1229) -2294.99,1201.69 -2289.31,1196 cw(c-2305.79,1179.52) -2282.48,1179.52 U1.12
NetR7_2: R7.2 U1.14 | length 65.3
  Top Layer w10: R7.2@-2372.72,1131 ccw(c-2354.07,1149.65) -2354.07,1123.27 U1.14
NetR8_2: R8.2 U1.16 | length 82
  Top Layer w10: R8.2@-2372.72,1051 -2342.35,1051 ccw(c-2342.35,1083.9) U1.16
NetR22_2: R22.2 TBP1.1 | length 61.6
  Top Layer w10: R22.2 TBP1.1 ; TBP1.1@-49.73,1055.43 ccw(c-49.73,1057.44) TBP1.1@-48.31,1056.02
NetR23_2: R23.2 TBP2.1 | length 60
  Top Layer w12: TBP2.1 R23.2
NetU1_15: U1.15 U4.16 | length 2275.2
  Top Layer w10: v2(-2593.31,1076) cw(c-2578.31,1076) -2578.31,1091 -2350.38,1091 ccw(c-2350.38,1108.07) -2338.31,1096 cw(c-2319.98,1077.68) -2319.98,1103.59 U1.15 ; v2(-2103.31,1061) -2009.73,1061 cw(c-2009.73,931) -1917.8,1022.92 -1857.74,962.86 ccw(c-1744.61,1076) -1744.61,916 -865.55,916 ccw(c-865.55,1016) -765.55,1016 U4.16
  Bottom Layer w10: v2(-2593.31,1076) -2355.81,1076 -2340.81,1061 v2(-2103.31,1061)
NetU3_5: U3.5 U4.23 | length 2532
  Top Layer w10: U3.5 -2675.41,965.53 cw(c-2675.41,996.56) -2706.44,996.56 cw(c-2672.01,996.56) -2672.01,1031 v2(-2663.31,1031) ; v2(-2123.31,1031) -2009.73,1031 cw(c-2009.73,931) -1939.02,1001.71 -1884.56,947.26 ccw(c-1760.82,1071) -1760.82,896 -515.55,896 ccw(c-515.55,996) -415.55,996 U4.23
  Bottom Layer w10: v2(-2663.31,1031) v2(-2123.31,1031)
NRF_N: D1.3 U5.6 | length 479
  Top Layer w10.01: D1.3 -1739.13,1567.78 -1761.85,1545.06 ccw(c-1754.75,1538) -1764.76,1538 -1764.76,1533.95 ccw(c-1731.81,1533.95) -1763.77,1525.95 ccw(c-1731.81,1533.95) -1731.81,1501 -1716.81,1501 ccw(c-1716.81,1516) -1701.81,1516 cw(c-1686.81,1516) -1671.81,1516 ccw(c-1656.81,1516) -1656.81,1501 -1641.81,1501 ccw(c-1641.81,1505) -1637.81,1505 cw(c-1633.81,1505) -1629.81,1505 ccw(c-1625.81,1505) -1625.81,1501 -1521.81,1501 ccw(c-1521.81,1536) -1486.81,1536 -1504.3,1553.5 U5.6@-1504.3,1584.29
NRF_P: D1.1 U5.5 | length 482.7
  Top Layer w10.01: D1.1 -1805.4,1567.78 -1782.68,1545.06 cw(c-1789.78,1538) -1779.77,1538 -1779.77,1533.95 ccw(c-1731.81,1533.95) -1779.75,1532.51 ccw(c-1731.81,1533.95) -1731.81,1485.99 -1521.81,1485.99 ccw(c-1521.81,1536) -1471.8,1536 -1454.3,1553.5 U5.5@-1454.3,1584.29
R\T\S\: Q1.3 R25.1 U5.14 | length 624.4
  Top Layer w10: R25.1@-1405.4,1115 cw(c-1365.4,1115) -1365.4,1155 Q1.3 -1192.81,1155 ccw(c-1192.81,1191) -1156.81,1191 ccw(c-1191.81,1191) -1191.81,1226 -1291.81,1226 cw(c-1291.81,1288.5) -1354.3,1288.5 U5.14@-1354.3,1367.75
SCL: J2.11 R11.1 TP6.1 U3.7 U4.6 | length 3117.5
  Top Layer w10: R11.1 -3272.08,1551.31 -3119.88,1551 cw(c-3119.96,1457.83) -3119.8,1551 cw(c-3119.96,1457.83) -3054.08,1523.71 J2.11 -2798.1,1267.73 cw(c-2918.31,1147.52) -2748.31,1147.52 -2748.31,1138.07 ccw(c-2731.24,1138.07) TP6.1 -2743.31,986.04 ccw(c-2683.43,986.04) -2683.43,926.16 U3.7 ; v2(-1008.31,1506) U4.6
  Bottom Layer w10: J2.11 v2@-1010.72,1505 ; v2@-1008.31,1505 v2@-1010.72,1505 ; v2(-1008.31,1506) cw(c-1010.72,1508.41) v2@-1010.72,1505
SDA: J2.10 R17.1 TP7.1 U3.8 U4.8 | length 3062.8
  Top Layer w10: R17.1@-3288.02,1456.46 R17.1@-3284.96,1456.46 ; R17.1@-3284.96,1453.95 -3125.74,1453.95 cw(c-3125.74,1353.95) -3055.02,1424.66 J2.10 -2847.6,1217.23 cw(c-2918.31,1146.52) -2818.31,1146.52 -2818.31,1138.07 ccw(c-2801.24,1138.07) TP7.1 -2813.31,1006.47 ccw(c-2713.31,1006.47) -2713.31,906.47 U3.8 ; v2(-1008.31,1406) U4.8
  Bottom Layer w10: J2.10 v2@-1010.72,1405 ; v2@-1008.31,1405 v2@-1010.72,1405 ; v2(-1008.31,1406) cw(c-1010.72,1408.41) v2@-1010.72,1405
USB_N: D1.4 J1.A7 J1.B7 | length 203.4
  Top Layer w10: J1.A7 -1780.59,1790.41 -1780.59,1782.33 ccw(c-1770.59,1782.33) -1777.68,1775.27 -1772.1,1769.7 cw(c-1789.76,1752.01) -1770.58,1768.04 -1767.05,1763.81 cw(c-1774.72,1757.4) -1764.76,1758.34 ; J1.B7 -1742.12,1783.23 cw(c-1752.12,1783.23) -1745.04,1776.18 -1763.82,1757.4 -1764.76,1756.45 -1764.76,1733.99 ccw(c-1754.76,1733.99) -1761.85,1726.94 -1739.14,1704.23 D1.4
USB_P: D1.6 J1.A6 J1.B6 | length 247
  Top Layer w10: D1.6 -1805.38,1704.23 -1779.76,1729.85 -1779.76,1752.01 ccw(c-1789.76,1752.01) -1782.69,1759.08 -1788.35,1764.73 cw(c-1770.59,1782.33) -1791.21,1768.2 -1798.02,1778.13 cw(c-1787.4,1785.41) -1800.27,1785.41 -1800.27,1790.41 J1.B6 -1801.18,1829.78 -1801.01,1831.59 -1800.27,1837.41 -1800.17,1838.22 cw(c-1787.4,1836.59) -1796.53,1845.67 cw(c-1787.4,1836.59) -1796.47,1845.72 cw(c-1787.4,1836.59) -1787.4,1849.46 -1775.59,1849.46 cw(c-1775.59,1836.59) -1766.51,1845.72 cw(c-1775.59,1836.59) -1766.46,1845.67 cw(c-1775.59,1836.59) -1762.97,1839.17 -1762.71,1837.89 -1762.01,1834.45 cw(c-1771.81,1832.45) -1761.81,1832.45 J1.A6
USB_RX: U4.35 U5.3 | length 1212.9
  Top Layer w10: U5.3 v2(-1353.31,1636) ; v2(-308.31,1606) U4.35
  Bottom Layer w10: v2(-1353.31,1636) cw(c-1303.31,1636) -1303.31,1686 -519.73,1686 cw(c-519.73,1566) -434.88,1650.85 -419.31,1635.29 ccw(c-348.6,1706) -348.6,1606 v2(-308.31,1606)
USB_TX: U4.34 U5.2 | length 1164.8
  Top Layer w10: U5.2 -1303.31,1603.32 v2(-1303.31,1636) ; v2(-308.31,1556) U4.34
  Bottom Layer w10: v2(-1303.31,1636) cw(c-1273.31,1636) -1273.31,1666 -519.73,1666 cw(c-519.73,1566) -449.02,1636.71 -397.6,1585.29 ccw(c-326.89,1656) -326.89,1556 v2(-308.31,1556)
VBAT: BT1.P C3.2 C7.2 TP3.1 U1.2 U1.3 U3.2 U3.3
VBUS: C1.2 C4.2 D1.5 J1.A4B9 J1.B4A9 TP4.1 U1.13 | length 1760.5
  Top Layer w20: U1.13@-2310.33,1148.03 -2340.28,1177.97 ccw(c-2371.73,1146.52) C1.2 -2371.73,1536 cw(c-2271.73,1536) -2271.73,1636 TP4.1 -1903.31,1636 ccw(c-1903.31,1673.17) -1866.14,1673.17 ; J1.B4A9 v2(-1866.14,1742.08) -1866.14,1673.17 ; D1.5 -1772.26,1665.54 cw(c-1801.81,1665.54) -1801.81,1636 -1848.31,1636 cw(c-1848.31,1653.83) -1866.14,1653.83 -1866.14,1673.17 ; J1.A4B9 -1675.35,1795.41 -1675.35,1785.41 ccw(c-1657.48,1785.41) -1675.35,1784.91 v2(-1674.33,1742.08)
  Bottom Layer w20: v2(-1866.14,1742.08) -1866.14,1788.17 cw(c-1773.31,1788.17) -1773.31,1881 cw(c-1773.31,1782.02) -1674.33,1782.02 v2(-1674.33,1742.08)
VSYS: C2.2 C5.2 TP1.1 U1.6 U1.10 U1.11 U2.1 U2.3 | length 911
  Top Layer w10: U1.6 -2018.7,1103.59 cw(c-2018.7,1060.61) v2(-1988.31,1091) ; C5.2 -2033,1212.55 ccw(c-1980.06,1212.55) -2027.25,1188.56 ccw(c-1980.06,1212.55) v2(-2017.5,1175.11)
  Top Layer w12: U2.1 -2033.31,1336 cw(c-1998.31,1336) -1998.31,1371 cw(c-1998.31,1331.2) -1958.5,1331.2 U2.3
  Top Layer w23: C5.2@-2033.31,1242.73 U2.1
  Top Layer w25: C2.2 cw(c-2209.38,1230.5) -2209.38,1276 -2188.18,1276 cw(c-2188.18,1211.13) -2142.31,1257 ccw(c-2103.68,1295.63) -2103.68,1241 TP1.1 C5.2@-2033.31,1241
  Bottom Layer w10: v2(-2017.5,1175.11) -1975.93,1133.55 cw(c-2018.48,1091) -1958.31,1091 cw(c-1973.31,1091) -1973.31,1076 cw(c-1973.31,1091) v2(-1988.31,1091)
pads on no net: BT1. J1. J1.A8 J1.B8 U2.4 U4.4 U4.17 U4.18 U4.19 U4.20 U4.21 U4.22 U4.28 U4.29 U4.30 U4.31 U4.32 U4.33 U4.36 U4.37 U5.7 U5.8 U5.9 U5.10 U5.11 U5.12 U5.15

## Polygon pours and split planes (outlines as drawn)
GND on Bottom Layer "GND Plane" (solid, pour order 3): -3543.31,0 0,0 0,2051.35 -3543.31,2051.35
GND on Top Layer "GND Plane" (solid, pour order 4): -3543.31,0 0,0 0,2051.35 -3543.31,2051.35

## Keep-outs
Keep-Out Layer:
  the board outline again, w10

## Other copper
Top Layer:
  region net VBAT: -2267.88,1041.07 -2267.9,1072.56 cw(c-2266.59,1072.56) -2266.59,1073.87 -2239.3,1073.87 cw(c-2239.3,1072.56) -2237.99,1072.56 -2237.98,1041.36 -2236.27,1010.54 -2242.31,1004 -2269.31,1005 -2271.62,1010.54
  region net VBAT: -2532.99,918.29 -2574.02,920.25 -2589.69,920.25 cw(c-2589.69,926.32) -2595.77,926.32 -2595.77,945.82 cw(c-2589.82,945.82) -2589.82,951.76 -2574.01,951.76 -2532.99,953.72 -2532.3,953.63
  region net VSYS: -2238.03,1185.8 -2238,1154.31 cw(c-2239.32,1154.31) -2239.32,1153 -2266.6,1153 cw(c-2266.61,1154.3) -2267.92,1154.31 -2267.93,1185.51 -2272.6,1210.84 -2261.54,1215.47 -2247.31,1218 -2237.16,1211.01
  region net VBUS: -2324.44,1176.26 -2292.9,1147.7 cw(c-2302.74,1147.7) -2302.74,1137.85 -2325.21,1137.85 cw(c-2325.21,1139.21) -2326.17,1138.25 -2326.56,1138.64 -2342.09,1165.79
  region net +3V3: -3413.31,1231 -3413.31,1201 -3428.14,1201 -3428.14,1201.44 -3433.31,1231
  region net VBAT: -2271.63,971.78 -2270.85,921.47 -2235.88,940.81 -2235.88,971.34 -2236.79,978.93 -2266.88,978.94
  region net VBAT: -2493.71,953.7 -2281.04,955.51 -2270.28,962.26 -2250.51,923.63 -2262.46,913.57 -2267.78,913.84 -2493.71,918.32
  region net VBAT: -2282.17,915.32 -356.35,321.41 -343.31,326 -113.31,476 -53.22,610.65 -2224.19,941.98 -2239.84,957.64 -2266.79,962.07

## Silkscreen, mask and mechanical layers (free items; w line width, h text height)
Top Overlay:
  drawing of 13 lines, arcs and shapes, not listed
  text "Bluetooth Foot Control" at -3293.31,1954.01 h40
  text "V1 27/12/2023" at -3293.31,1894.01 h40
  text "Pedro J. Belmonte Minano" at -3293.31,1834.01 h40
  text "JLCJLCJLCJLC" at -3293.31,1774.01 h40
Bottom Overlay:
  drawing of 38 lines, arcs and shapes, not listed
  text "Respect the roots," at -1975.2,1353.08 h40
  text "forget the rules." at -1975.2,1298.39 h40
  text "Bluetooth Foot Control" at -2344.31,818.01 h40
  text "V1 27/12/2023" at -2344.31,758.01 h40
  text "Pedro J. Belmonte Minano" at -2344.31,698.01 h40
  text "JLCJLCJLCJLC" at -2344.31,638.01 h40
Mechanical 16:
  lines w5: -1679.87,-3360.47 -1679.87,-2410.47 280.13,-2410.47 ; -1679.87,-2900.47 820.13,-2900.47 ; -569.87,-3365.47 -569.87,-2415.47 ; -569.87,-3130.47 1930.13,-3130.47 3140.13,-3130.47 ; -569.87,-2900.47 1930.13,-2900.47 ; -569.87,-2660.47 1930.13,-2660.47 ; 1390.13,-2410.47 -569.87,-2410.47 2430.13,-2410.47 ; 1930.13,-3360.47 1930.13,-2410.47 ; 3140.13,-3360.47 3140.13,-2410.47 1180.13,-2410.47 4180.13,-2410.47 4180.13,-3360.47